# Altium PCB Fly_Buck_Power_Supply_for_Inverter.PcbDoc
Units mm, origin at the board's own origin, x right, y up, seen from the top; angles counter-clockwise.
Board outline 72.81 x 59 mm, 2 copper layers (Top Layer, Bottom Layer), stack 1.24 mm thick; 57 components, 27 nets, 141 pads, 4 vias.
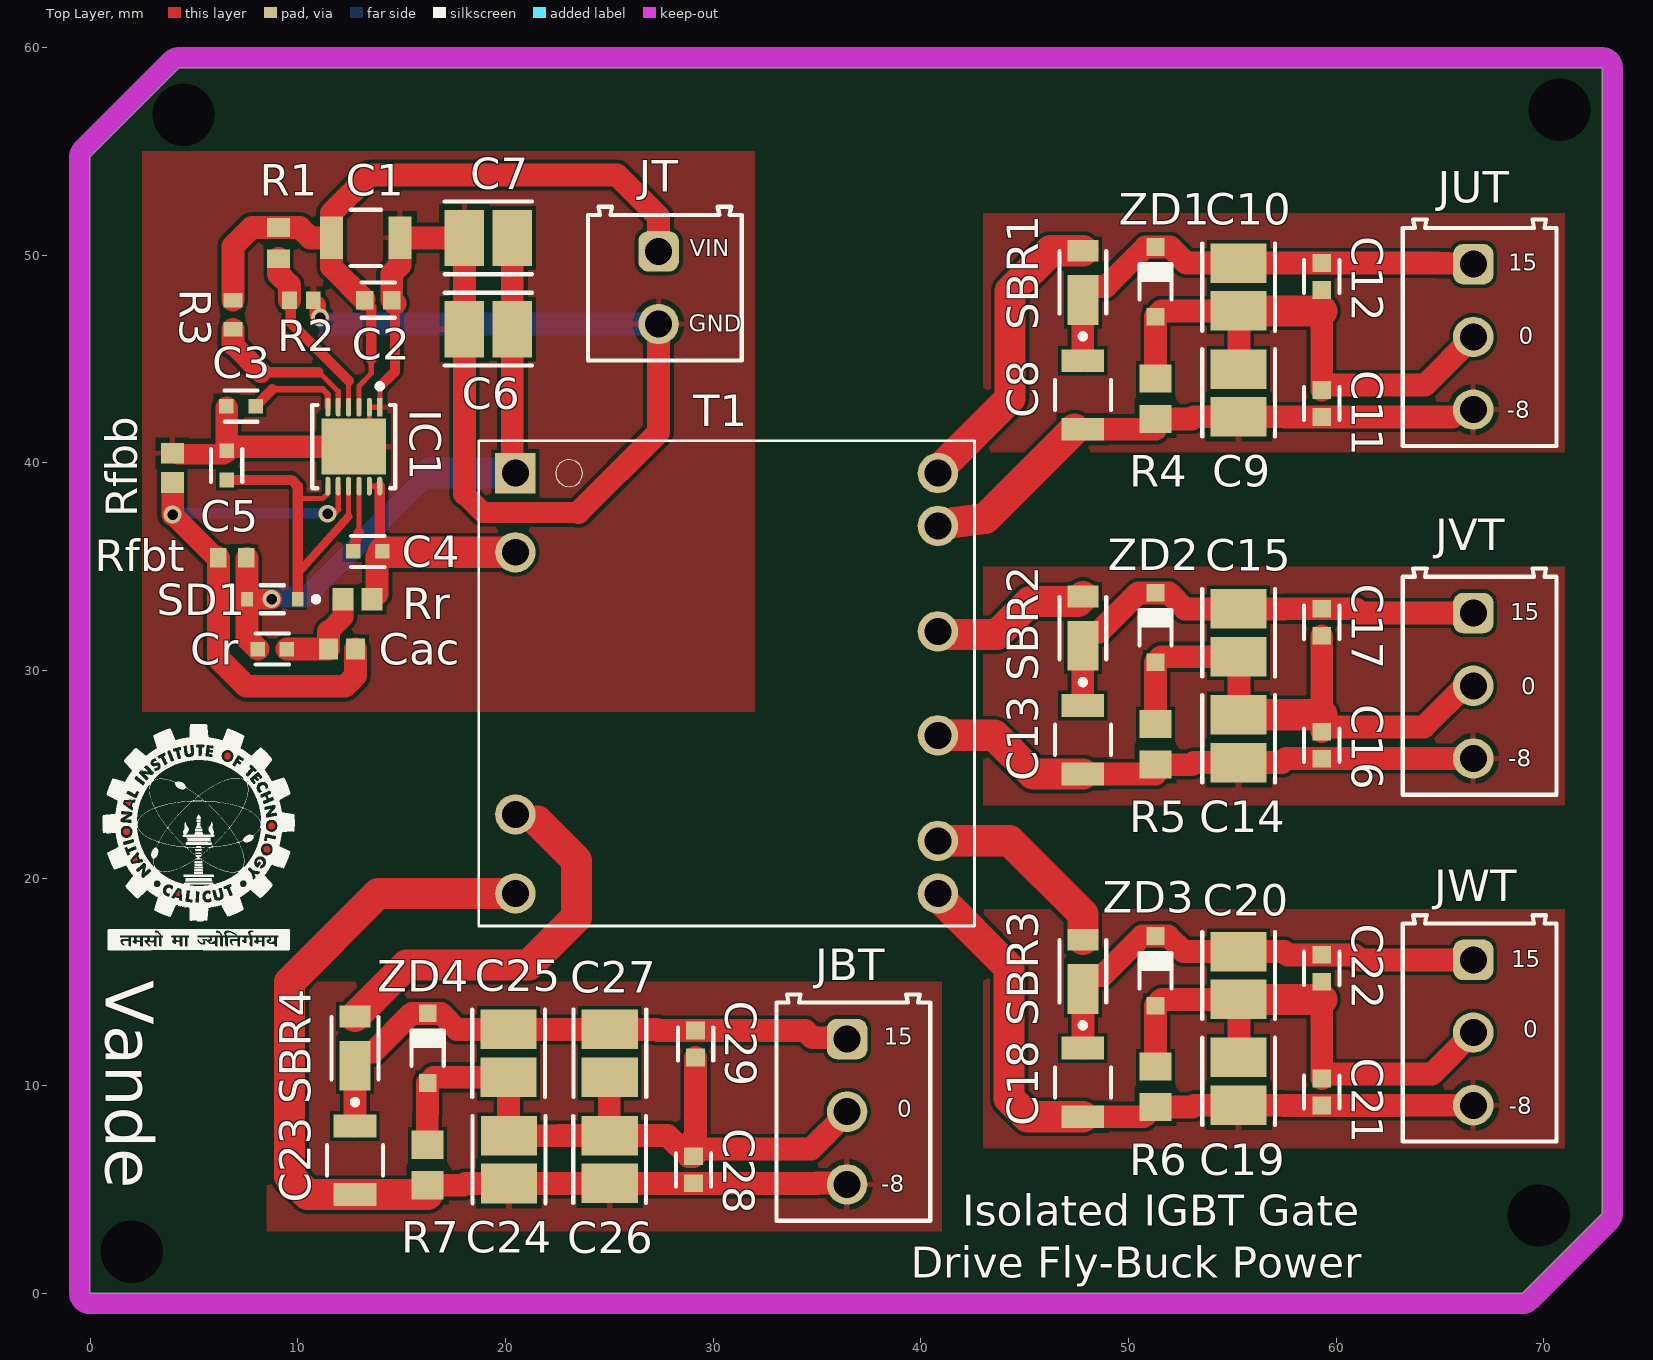
[diagram p0: Top Layer view]
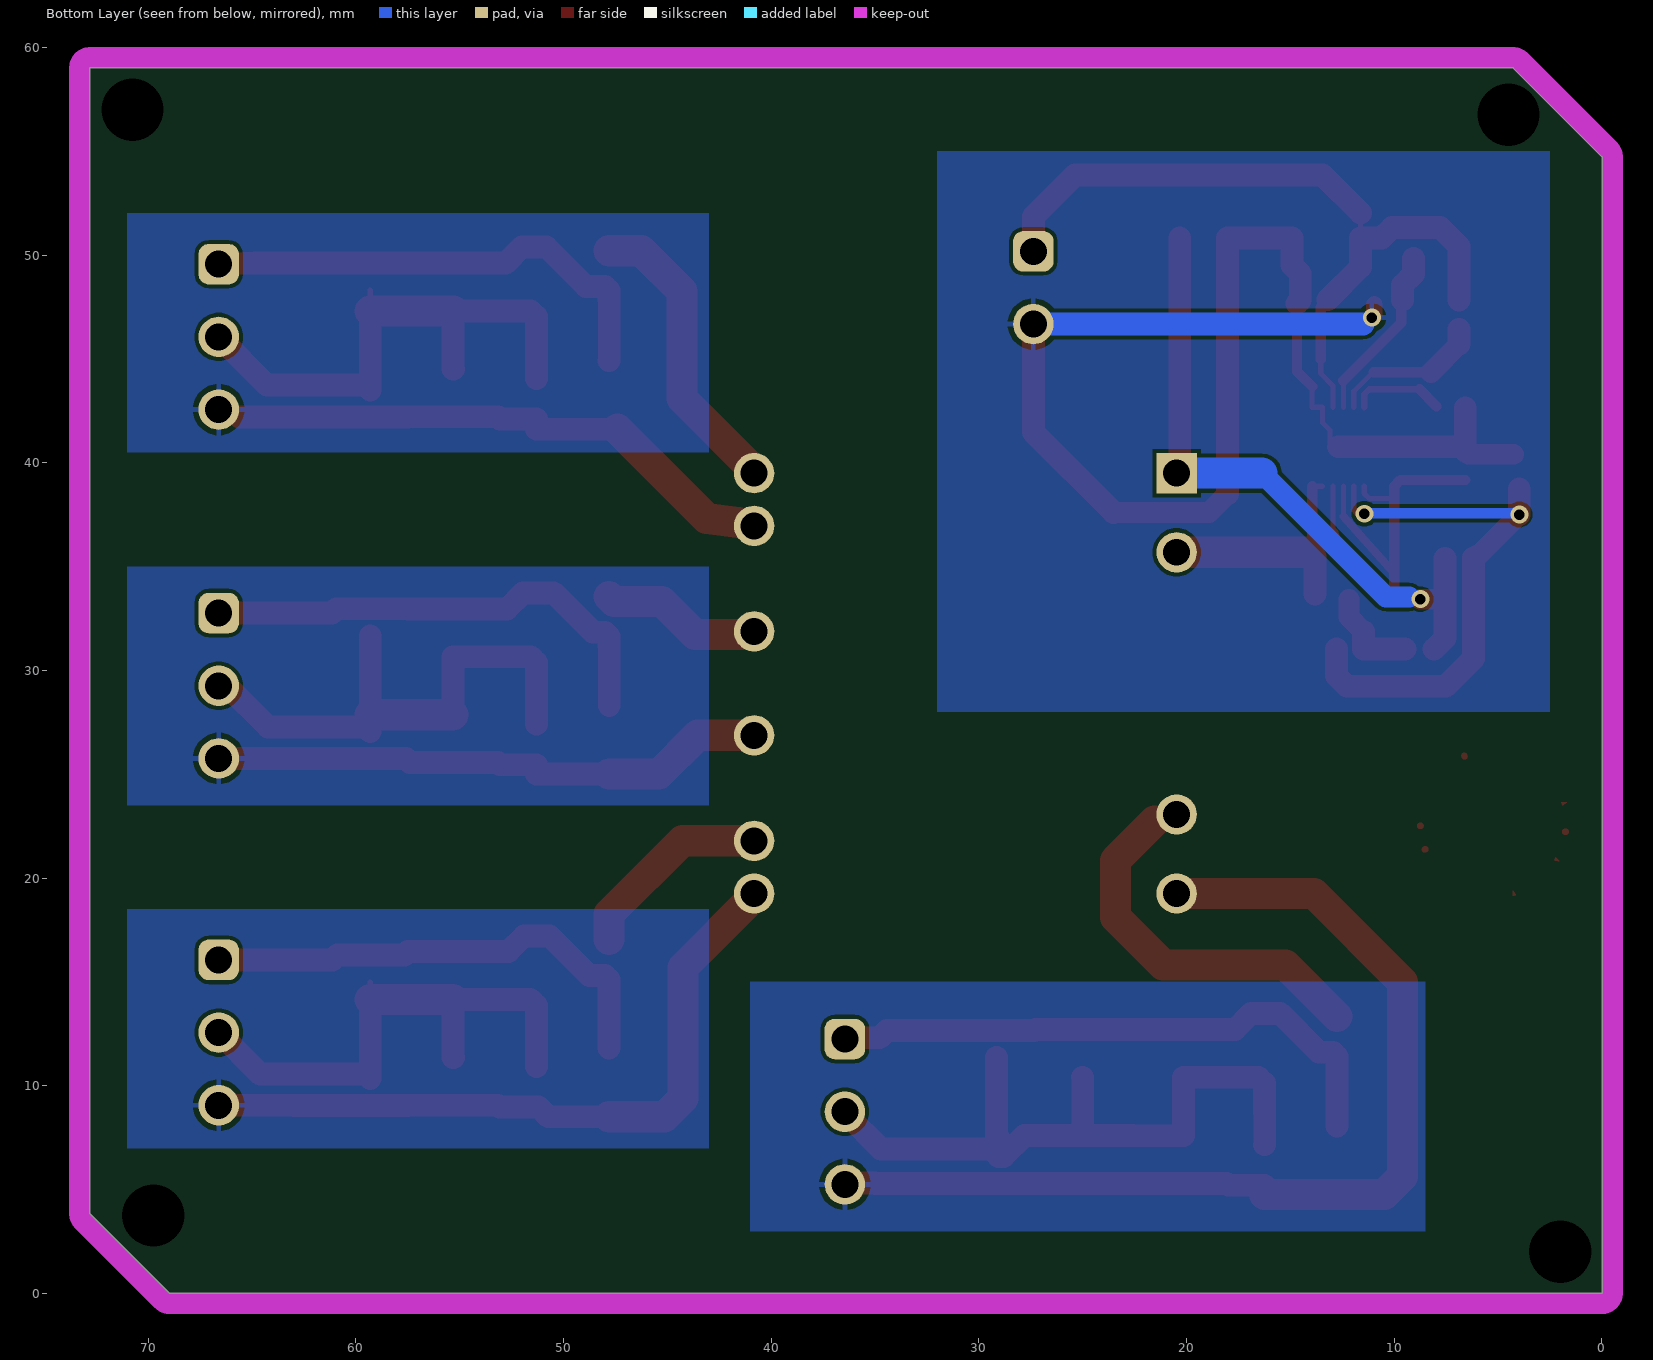
[diagram p1: Bottom Layer view, seen from below]
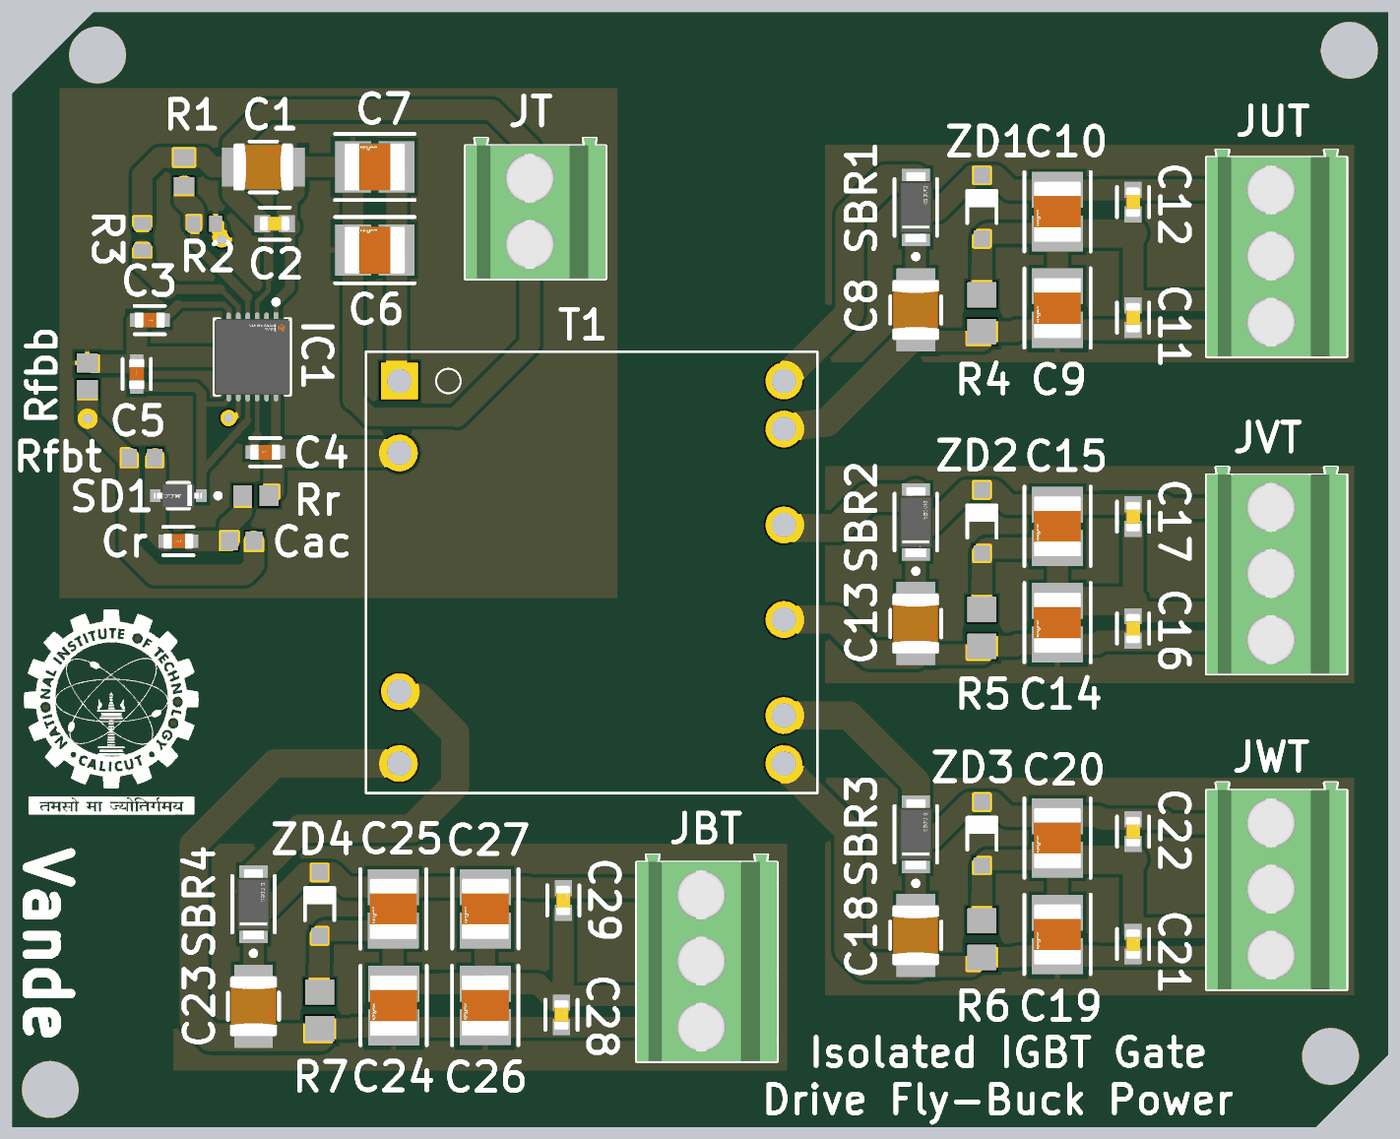
[diagram p2: 3D render of the assembled board from above, using the file's embedded part models]

## Layer stack, top to bottom
Top Solder: solder mask 0.07, SM-001, Dk 4
Top Layer: signal copper 0.12
Dielectric 1: dielectric 1, FR-4, Dk 4.8
Bottom Layer: signal copper 0.12
Bottom Solder: solder mask 0.07, SM-001, Dk 4

## Board outline
-0.01,0.009 68.97,0.009 72.802,3.841 72.802,59.009 4.272,59.009 -0.01,54.727

## Design rules (kind name [scope] priority, off if disabled: settings)
Clearance [All] p1: gap=0.09 ignorepadtopadclearanceinfootprint=FALSE
HoleSize [All] p1: absolutevalues=TRUE maxlimit=3.1 minlimit=0.025 maxpercent=80.000 minpercent=20.000
MinimumSolderMaskSliver [All] p1: minsoldermaskwidth=0.09
PolygonConnect [All] p1: connectstyle=Relief reliefconductorwidth=0.254 reliefentries=4 polygonreliefangle="90 Angle" airgapwidth=0.254
RoutingVias [All] p1: holewidth=0.506 width=0.864 viastyle="Through Hole" minholewidth=0.2 minwidth=0.66 maxholewidth=3.1 maxwidth=2.6
SolderMaskExpansion [All] p1: expansion=0.102 istentingtop=FALSE
UnRoutedNet [All] p1: checkbadconnections=TRUE
Width [All] p1: maxlimit=3 minlimit=0.15 preferedwidth=0.25
27 further rules are at their usual default settings.

## Components (designator, comment, footprint, x,y, rotation, side; value= is the part's Value field where it differs from the comment)
C1 "GRM32ER71H106KA12L" FP-GRM32-MFG 13.275,50.827 r0 top value=10uF
C2 "C0603X104K5RACTU" FP-C0603-CJ-MFG 13.875,47.827 r0 top value=100nF
C3 "C1608X7R1H103K080AA" FP-C1608-080-0_1-MFG 7.264,42.723 r180 top
C4 "C1608X7R1H103K080AA" FP-C1608-080-0_1-MFG 13.375,35.727 r0 top
C5 "C1608X5R1E105K080AC" FP-C1608-080-0_1-MFG 6.575,39.867 r270 top
C6 "GRM32ER71E226KE15L" FP-GRM32E-0_3-0_2-IPC_B 19.175,46.427 r180 top
C7 "GRM32ER71E226KE15L" FP-GRM32E-0_3-0_2-IPC_B 19.175,50.827 r180 top
C8 "GRM32ER71H106KA12L" FP-GRM32-MFG 47.802,43.259 r270 top value=10uF
C9 "GRM32ER71E226KE15L" FP-GRM32E-0_3-0_2-IPC_B 55.302,43.359 r270 top
C10 "GRM32ER71E226KE15L" FP-GRM32E-0_3-0_2-IPC_B 55.302,48.458 r270 top
C11 "C0603X104K5RACTU" FP-C0603-CJ-MFG 59.302,42.849 r270 top value=100nF
C12 "C0603X104K5RACTU" FP-C0603-CJ-MFG 59.302,48.968 r270 top value=100nF
C13 "GRM32ER71H106KA12L" FP-GRM32-MFG 47.802,26.659 r270 top value=10uF
C14 "GRM32ER71E226KE15L" FP-GRM32E-0_3-0_2-IPC_B 55.302,26.709 r270 top
C15 "GRM32ER71E226KE15L" FP-GRM32E-0_3-0_2-IPC_B 55.302,31.808 r270 top
C16 "C0603X104K5RACTU" FP-C0603-CJ-MFG 59.302,26.399 r270 top value=100nF
C17 "C0603X104K5RACTU" FP-C0603-CJ-MFG 59.302,32.318 r270 top value=100nF
C18 "GRM32ER71H106KA12L" FP-GRM32-MFG 47.802,10.159 r270 top value=10uF
C19 "GRM32ER71E226KE15L" FP-GRM32E-0_3-0_2-IPC_B 55.302,10.209 r270 top
C20 "GRM32ER71E226KE15L" FP-GRM32E-0_3-0_2-IPC_B 55.302,15.308 r270 top
C21 "C0603X104K5RACTU" FP-C0603-CJ-MFG 59.302,9.699 r270 top value=100nF
C22 "C0603X104K5RACTU" FP-C0603-CJ-MFG 59.302,15.649 r270 top value=100nF
C23 "GRM32ER71H106KA12L" FP-GRM32-MFG 12.752,6.409 r270 top value=10uF
C24 "GRM32ER71E226KE15L" FP-GRM32E-0_3-0_2-IPC_B 20.167,6.443 r270 top
C25 "GRM32ER71E226KE15L" FP-GRM32E-0_3-0_2-IPC_B 20.152,11.558 r270 top
C26 "GRM32ER71E226KE15L" FP-GRM32E-0_3-0_2-IPC_B 25.015,6.447 r270 top
C27 "GRM32ER71E226KE15L" FP-GRM32E-0_3-0_2-IPC_B 25.024,11.562 r270 top
C28 "C0603X104K5RACTU" FP-C0603-CJ-MFG 29.052,5.949 r270 top value=100nF
C29 "C0603X104K5RACTU" FP-C0603-CJ-MFG 29.152,12.009 r270 top value=100nF
Cac "C0603X102K5RACTU" CAPC1608X87X35NL20T15 12.125,31.027 r0 top
Cr "C1608X7R1H103K080AA" FP-C1608-080-0_1-MFG 8.775,31.027 r180 top
IC1 "LM5160DNTT" FP-DNT0012B-IPC_B 12.695,40.771 r270 top
JBT "691214110003" 691214110003 36.75,8.75 r270 top
JT "691214110002" 691214110002 27.675,48.427 r270 top
JUT "691214110003" 691214110003 66.902,46.059 r270 top
JVT "691214110003" 691214110003 66.902,29.259 r270 top
JWT "691214110003" 691214110003 66.902,12.559 r270 top
R1 "RK73H1JTTD1003F" RESC1608X55X30ML20T10 9.075,50.577 r270 top
R2 "CRCW06038K45FKEA" RESC1609X50X30LL10T20 10.175,47.827 r0 top
R3 "RC0603FR-07453RL" RESC1608X55X25NL10T15 6.875,47.127 r270 top
R4 "ERJ-6ENF5110V" RESC2013X70X40ML20T20 51.302,43.084 r270 top
R5 "ERJ-6ENF5110V" RESC2013X70X40ML20T20 51.302,26.434 r270 top
R6 "ERJ-6ENF5110V" RESC2013X70X40ML20T20 51.302,9.959 r270 top
R7 "ERJ-6ENF5110V" RESC2013X70X40ML20T20 16.252,6.184 r270 top
Rfbb "ERA3AEB2052V" RESC1608X55X30ML20T20 3.962,39.751 r90 top
Rfbt "ERJ-3EKF8662V" RESC1608X55X30NL15T15 6.85,35.427 r180 top
Rr "ERA3AEB2052V" RESC1608X55X30ML20T20 12.875,33.427 r180 top
SBR1 "DFLS1200-7" FP-PowerDI123-MFG 47.802,48.684 r270 top value=23pF
SBR2 "DFLS1200-7" FP-PowerDI123-MFG 47.802,32.034 r270 top value=23pF
SBR3 "DFLS1200-7" FP-PowerDI123-MFG 47.802,15.509 r270 top value=23pF
SBR4 "DFLS1200-7" FP-PowerDI123-MFG 12.752,11.809 r270 top value=23pF
SD1 "RB500V-40-TP" FP-SOD-323-MFG 8.775,33.427 r180 top
T1 "750315038" PCBComponent_1 30.775,29.629 r0 top
ZD1 "MMSZ5245B-E3-08" VISH-SOD-123-2_V 51.302,48.709 r90 top
ZD2 "MMSZ5245B-E3-08" VISH-SOD-123-2_V 51.302,32.059 r90 top
ZD3 "MMSZ5245B-E3-08" VISH-SOD-123-2_V 51.302,15.534 r90 top
ZD4 "MMSZ5245B-E3-08" VISH-SOD-123-2_V 16.252,11.809 r90 top

## Footprints (in the part's own frame and the unit in brackets; to place one, negate y for a bottom-side part, rotate by r counter-clockwise, add the part's x,y. Pads: shape width x height; smd on the part's side, far side on the other; paste and mask are expansions set on the pad)
691214110002 [mm] "3.50 mm Horizontal Entry Modular, 2p"
  rrect50% 1.95x1.95 hole 1.3: 1(-1.75,-0.3)
  round 1.95 hole 1.3: 2(1.75,-0.3)
  silkscreen extent -3.9,-3.7 3.5,3.7, body extent -3.95,-3.7 3.5,3.7, height 8.55
691214110003 [mm] "3.50 mm Horizontal Entry Modular, 3p"
  rrect50% 1.95x1.95 hole 1.3: 1(-3.5,-0.3)
  round 1.95 hole 1.3: 2(0,-0.3) 3(3.5,-0.3)
  silkscreen extent -5.65,-3.7 5.25,3.7, body extent -5.7,-3.7 5.25,3.7, height 8.55
CAPC1608X87X35NL20T15 [mm] "Chip Capacitor, 2-Leads, Body 1.60x0.80mm, IPC Medium Density"
  rect 0.9x1 smd: 1(-0.65,0) 2(0.65,0)
  body extent -0.9,-0.5 0.9,0.5, height 0.87
FP-C0603-CJ-MFG [mm]
  rect 0.85x0.9 smd paste+0 mask+0: 1(-0.65,0) 2(0.65,0)
  silkscreen extent -0.8,-0.85 0.8,0.85, body extent -1.2,-0.6 1.2,0.6, height 0.25
FP-C1608-080-0_1-MFG [mm]
  rect 0.7x0.7 smd paste+0 mask+0: 1(-0.7,0) 2(0.7,0)
  silkscreen extent -0.8,-0.75 0.8,0.75, body extent -1.15,-0.55 1.15,0.55, height 0.25
FP-DNT0012B-IPC_B [mm]
  rect 0.91x0.242 smd paste+0 mask+0: 1(-1.901,1.25)
  rrect100% 0.91x0.242 smd paste+0 mask+0: 2(-1.901,0.75) 3(-1.901,0.25) 4(-1.901,-0.25) 5(-1.901,-0.75) 6(-1.901,-1.25) 7(1.901,-1.25) 8(1.901,-0.75) 9(1.901,-0.25) 10(1.901,0.25) 11(1.901,0.75) 12(1.901,1.25)
  rect 2.7x3.1 smd paste-1000 mask+0: 13(0,0)
  silkscreen extent -3.03,-2 2,2, body extent -2.61,-2.25 2.61,2.25, height 0.25
FP-GRM32-MFG [mm]
  rect 1.1x2.05 smd paste+0 mask+0: 1(-1.65,0) 2(1.65,0)
  silkscreen extent -0.73,-1.35 0.73,1.35, body extent -2.3,-1.45 2.3,1.45, height 0.25
FP-GRM32E-0_3-0_2-IPC_B [mm]
  rect 1.903x2.706 smd paste+0 mask+0: 1(-1.151,0) 2(1.151,0)
  silkscreen extent -2.1,-1.75 2.1,1.75, body extent -2.35,-1.6 2.35,1.6, height 0.25
FP-PowerDI123-MFG [mm]
  rect 2.4x1.5 smd paste+0 mask+0: 1(0.85,0)
  rect 1.05x1.5 smd paste+0 mask+0: 2(-1.525,0)
  silkscreen extent -1.5,-1.13 2.72,1.13, body extent -2.15,-1.06 2.15,1.06, height 0.25
FP-SOD-323-MFG [mm]
  rect 0.56x0.69 smd paste+0 mask+0: 1(-1.22,0) 2(1.22,0)
  silkscreen extent -2.23,-0.67 0.56,0.67, body extent -1.6,-0.77 1.6,0.77, height 0.25
PCBComponent_1 [mil]
  rect 76.5x76.5 hole 51: 1(-405.5,388.5)
  round 76.5 hole 51: 2(-405.5,238.5) 5(-405.5,-258.5) 6(-405.5,-408.5) 7(395.5,-408.5) 8(395.5,-308.5) 10(395.5,-108.5) 11(395.5,88.5) 13(395.5,288.5) 14(395.5,388.5)
  silkscreen extent -475,-470 465,450
RESC1608X55X25NL10T15 [mm] "Chip Resistor, 2-Leads, Body 1.60x0.80mm, IPC Medium Density"
  rect 0.7x0.9 smd: 1(-0.7,0) 2(0.7,0)
  body extent -0.85,-0.45 0.85,0.45, height 0.55
RESC1608X55X30ML20T10 [mm] "Chip Resistor, 2-Leads, Body 1.60x0.80mm, IPC Low Density"
  rect 0.9x1.1 smd: 1(-0.75,0) 2(0.75,0)
  body extent -0.9,-0.5 0.9,0.5, height 0.55
RESC1608X55X30ML20T20 [mm] "Chip Resistor, 2-Leads, Body 1.60x0.80mm, IPC Low Density"
  rect 1x1.1 smd: 1(-0.7,0) 2(0.7,0)
  body extent -0.9,-0.5 0.9,0.5, height 0.55
RESC1608X55X30NL15T15 [mm] "Chip Resistor, 2-Leads, Body 1.60x0.80mm, IPC Medium Density"
  rect 0.8x0.95 smd: 1(-0.675,0) 2(0.675,0)
  body extent -0.87,-0.48 0.87,0.48, height 0.55
RESC1609X50X30LL10T20 [mm] "Chip Resistor, 2-Leads, Body 1.55x0.85mm, IPC High Density"
  rect 0.7x0.85 smd: 1(-0.575,0) 2(0.575,0)
  body extent -0.82,-0.48 0.82,0.48, height 0.5
RESC2013X70X40ML20T20 [mm] "Chip Resistor, 2-Leads, Body 2.00x1.25mm, IPC Low Density"
  rect 1.35x1.55 smd: 1(-0.975,0) 2(0.975,0)
  body extent -1.1,-0.72 1.1,0.72, height 0.7
VISH-SOD-123-2_V [mm] "SMD, 2-Leads, Body 2.7x1.55mm, Height 1.35mm"
  rect 0.85x0.85 smd: 1(-1.675,0) 2(1.675,0)
  silkscreen extent -0.85,-0.78 0.85,0.78, body extent -1.35,-0.77 1.35,0.77, height 1.35

## Part data
C1 C8 C13 C18 C23: library part CMP-2000-05261-2, "CAP CER 10µF 50V X7R 1210", Capacitance=10uF, Manufacturer=Murata, Package=GRM32, Temperature="-55°C to +125°C", Temperature Characteristic=X7R, Temperature Coefficient=15%, Temperature Range High=+125°C, Temperature Range Low=-55°C, Tolerance=10%, Voltage Rating=50V, Automotive=No, Category=Cap, ComponentLink2Description=Datasheet, ComponentLink2URL=https://search.murata.co.jp/Ceramy/image/img/A01X/G101/ENG/GRM32ER71H106KA12-01.pdf, Device Class L1="Passive Components", Device Class L2=Capacitors, Device Class L3="Ceramic Capacitors", Digikey Description="CAP CER 10UF 50V X7R 1210", Height=2.7mm, Lead Free=Yes, Manufacturer Part Number=GRM32ER71H106KA12L, Material=Ceramic, Mouser Description="1210 10 uF 50 V ±10% Tolerance X7R SMT Multilayer Ceramic Capacitor", Octopart=https://octopart.com/grm32er71h106ka12l-murata-10470987, RoHS=TRUE
C2 C11 C12 C16 C17 C21 C22 C28 C29: library part CMP-2006-03300-2, "CAP CER 0.1µF 50V X7R 0603", Capacitance=100nF, Manufacturer=Kemet, Package=C0603-CJ, Temperature="-55°C to +125°C", Temperature Characteristic=X7R, Temperature Coefficient=15%, Temperature Range High=+125°C, Temperature Range Low=-55°C, Tolerance=10%, Voltage=50V, Automotive=No, Category=Cap, ComponentLink2Description=Datasheet, ComponentLink2URL=https://content.kemet.com/datasheets/KEM_C1013_X7R_FT-CAP_SMD.pdf, Device Class L1="Passive Components", Device Class L2=Capacitors, Device Class L3="Ceramic Capacitors", Digikey Description="CAP CER 0.1UF 50V X7R 0603", Height=0.95mm, Ipc Land Pattern Name=CAPC16080X80, Lead Free=Yes, Manufacturer Part Number=C0603X104K5RACTU, Material=Ceramic, Mouser Description="Capacitor; Ceramic; Cap 0.1uF; Tol+10%; SMT; Flexible Termination; Vol-Rtg 50V; TR", Octopart=https://octopart.com/c0603x104k5ractu-kemet-9145062, RoHS=TRUE, Voltage Rating=50V
C3 C4 Cr: library part CMP-2000-06026-2, "Multilayer Ceramic Capacitors 0.01µF ±10% 50V X7R SMD 0603", Capacitance=10nF, Case Code (Imperial)=0603, Case Code (Metric)=1608, Dielectric=X7R, Dielectric Material=Ceramic, Max Operating Temperature=125°C, Min Operating Temperature=-55°C, Package Quantity=1, Tolerance=10%, Voltage=50V, Case/Package=0603, Construction=Flat, Depth=0.8mm, Height=0.8mm, Lead Free="Lead Free", Length=1.6mm, Mount="Surface Mount", Packaging="Tape and Reel", Radiation Hardening=No, REACH SVHC="No SVHC", Resistor Type=Ceramic, RoHS Compliant=Yes, Series=C, Termination=SMD/SMT, Thickness=0.037inch, Voltage Rating=50V, Voltage Rating (DC)=50V, Weight=7.1E-05oz, Width=0.031inch
C5: library part CMP-08246-002647-1, "Multilayer Ceramic Capacitors 1μF ±10% 25V X5R SMD 0603", Capacitance=1uF, Case Code (Imperial)=0603, Case Code (Metric)=1608, Dielectric=X5R, Dielectric Material=Ceramic, Max Operating Temperature=85°C, Min Operating Temperature=-55°C, Package Quantity=1, Tolerance=10%, Voltage Rating=25V, Case/Package=0603, Depth=0.8mm, Lead Free="Lead Free", Length=0.063inch, Mount="Surface Mount", Number of Pins=2, Packaging="Tape and Reel", REACH SVHC="No SVHC", Resistor Type=Ceramic, RoHS Compliant=Yes, Series=C, Termination=SMD/SMT, Thickness=0.037inch, Voltage Rating (DC)=25V, Weight=7.1E-05oz, Width=0.031inch
C6 C7 C9 C10 C14 C15 C19 C20 C24 C25 C26 C27: library part CMP-1662-00021-2, "Chip Multilayer Ceramic Capacitors for General Purpose, 1210, 22µF, X7R, 15%, 10%, 25V", Capacitance=22uF, Case Code (Imperial)=1210, Case Code (Metric)=3225, Dielectric=X7R, Max Operating Temperature=125°C, Min Operating Temperature=-55°C, Package Quantity=1, Tolerance=10%, Voltage=25V, Case/Package=1210, Depth=2.5mm, Height=2.5mm, Lead Free="Lead Free", Length=3.2mm, Material=Ceramic, Mount="Surface Mount", Number of Pins=2, Packaging="Tape and Reel", Radiation Hardening=No, REACH SVHC="No SVHC", Termination=SMD/SMT, Thickness=0.106inch, Voltage Rating=25V, Voltage Rating (DC)=25V, Width=0.098inch
Cac: library part CMP-2006-02994-1, "Multilayer Ceramic Capacitor, 1000 pF, 50 V, ± 10%, X7R, 0603 [1608 Metric]", Manufacturer=Kemet, Part Number=C0603X102K5RACTU
IC1: "LM5160 wide input 65V, 2A synchronous buck/Fly-Buck converter 12-WSON -40 to 125"
JBT JUT JVT JWT: library part CMP-1502-02466-2, "Conn Terminal Block 3 POS 3.5mm Solder ST Thru-Hole 10A Box", Color="Blue, Green", Current=10A, Max Operating Temperature=105°C, Min Operating Temperature=-40°C, Voltage=300V, Contact Material=Brass, Contact Plating="Brass, Tin", Current Rating=10A, Height=12.2mm, Housing Material=Nylon, Lead Pitch=3.5mm, Length=7.4mm, Mount="Through Hole", NexarPartId=18818289, Number of Contacts=3, Number of Levels=1, Number of Pins=3, Number of Positions Per Level=3, Packaging=Box, Pitch=3.5052mm, Plating="Brass, Steel", REACH SVHC=Unknown, RoHS=Compliant, Stripping Length=-6mm, Termination=Screw, Voltage Rating=300V, Width=10.9mm, Wire Gauge (Max)=24AWG, Wire Gauge (Min)=16AWG, Wire/Cable Gauge=24AWG
JT: library part CMP-1502-02464-2, "Conn Terminal Block 2 POS 3.5mm Solder ST Thru-Hole 10A Box", Color="Blue, Green", Current=10A, Max Operating Temperature=105°C, Min Operating Temperature=-40°C, Voltage=300V, Contact Material=Brass, Contact Plating="Brass, Tin", Current Rating=10A, Height=8.7mm, Housing Material=Nylon, Lead Pitch=3.5mm, Length=7.4mm, Mount="Through Hole", NexarPartId=18818288, Number of Contacts=2, Number of Levels=1, Number of Pins=2, Number of Positions Per Level=2, Number of Rows=1, Packaging=Box, Pitch=3.5052mm, Plating="Brass, Steel", REACH SVHC=Unknown, RoHS=Compliant, Stripping Length=-6mm, Termination=Screw, Voltage Rating=300V, Width=7.9mm, Wire Gauge (Max)=24AWG, Wire Gauge (Min)=16AWG, Wire/Cable Gauge=24AWG
R1: library part CMP-2000-01100-1, "Res Thick Film 0603 100K Ohm 1% 0.1W(1/10W) ±100ppm/C Pad SMD Automotive T/R", Manufacturer="KOA Speer", Part Number=RK73H1JTTD1003F
R2: library part CMP-2000-03623-1, "SMD Chip Resistor, 8.45K Ohm, ± 1%, 100 mW, 0603 [1608 Metric], Thick Film, General Purpose", Manufacturer="Vishay Dale", Part Number=CRCW06038K45FKEA
R3: library part CMP-2000-04056-1, "SMD Chip Resistor, 453 Ohm, ± 1%, 100 mW, 0603 [1608 Metric], Thick Film, General Purpos", Manufacturer=Yageo, Part Number=RC0603FR-07453RL
R4 R5 R6 R7: library part CMP-2001-00217-1, "SMD Chip Resistor, 511 Ohm, ± 1%, 125 mW, 0805 [2012 Metric], Thick Film, Precision", Manufacturer=Panasonic, Part Number=ERJ-6ENF5110V
Rfbb Rr: library part CMP-2000-00949-1, "Res Thin Film 0603 20.5K Ohm 0.1% 0.1W(1/10W) ±25ppm/C Pad SMD Automotive T/R", Manufacturer=Panasonic, Part Number=ERA3AEB2052V
Rfbt: library part CMP-2000-00671-1, Manufacturer=Panasonic, Part Number=ERJ-3EKF8662V
SBR1 SBR2 SBR3 SBR4: library part CMP-2000-07540-2, "Rectifier Diode, Schottky, 200V, 1A", Capacitance=23pF, Forward Current=1A, Manufacturer="Diodes Inc.", Max Junction Temp=+175°C, Max Repetitive Reverse Voltage=200V, Max Surge Forward Current=40A, Package=PowerDI123, Peak Reverse Current=2uA, Temperature="-65°C to +175°C", Temperature Range Low=-65°C, Automotive=Yes, Automotive Grade="Grade 0", Category=Diode, ComponentLink2Description=Datasheet, ComponentLink2URL=https://www.diodes.com/assets/Datasheets/ds30628.pdf, Device Class L1="Discrete Semiconductors", Device Class L2=Diodes, Device Class L3="Schottky Diodes", Digikey Description="DIODE SCHOTTKY 200V POWERDI123", Footprint Url=https://www.diodes.com/assets/Package-Files/PowerDI123.pdf, Height=1mm, Lead Free=Yes, Manufacturer Part Number=DFLS1200-7, Mouser Description="Schottky Diodes & Rectifiers SCHOTTKY RECTIFIER", Octopart=https://octopart.com/dfls1200-7-diodes+inc.-13134059, Reverse Voltage=200V, RoHS=TRUE, Temperature Range High=+175°C
SD1: library part CMP-56206-000003-1, "Rectifier Diode Schottky 45V 0.1A", Average Rectified Current=100mA, Max Reverse Voltage (DC)=40V, Max Surge Current=1A, Package Quantity=1, Lead Free="Lead Free", Mount="Surface Mount", Packaging="Tape and Reel"
ZD1 ZD2 ZD3 ZD4: library part CMP-0931-00033-1, "MMSZ5245 Series 15V ±5% 500 mW SMT Small Signal Zener Diode - SOD-123", Manufacturer="Vishay Semiconductor", Operating Temperature="-55 to 150 degC", Power Dissipation (mW)=500, Test Current (IZT1) (mA)=8.5, Tolerance="+/- 5%", Zener Voltage (NOM.) (V)=15, ComponentLink1Description="Manufacturer URL", ComponentLink1URL=http://www.vishay.com/, ComponentLink2Description=Datasheet, ComponentLink2URL=http://www.vishay.com/docs/85774/mmsz5225.pdf, ComponentLink3Description="Package Specification", ComponentLink3URL=http://www.vishay.com/docs/85774/mmsz5225.pdf, DatasheetVersion="Rev. 1.9", Int. Construction=Single, Mounting Technology="Surface Mount", PackageDescription="2-Pin SMD, Body 2.7 x 1.55 mm, Height 1.35 mm", PackageReference=SOD-123-2, PackageVersion="Rev. 1.9", Packing="Tape and Reel", PartNumber=MMSZ5245B-E3-08, RoHS=TRUE, Zener Impedance (IZT1) (Max.) (Ohm)=16

## Free pads (board coordinates)
  round 1.524 hole 3: 2(70.75,57) 3(69.75,3.75) 4(4.5,56.75) 7(2,2)

## Via types
v1: diameter 0.864, hole 0.506, Top Layer to Bottom Layer, 4 vias

## Nets (pads, with @x,y where several pads share a name; then routed paths per layer and width w, separated by ;. In a path a pad name is that pad's centre, name@x,y a point inside that pad or via, vN(x,y) a via of type N, cw(c..) or ccw(c..) an arc to the next point about the centre after c; other vN are vias at no path point)
BST: C4.1 IC1.10 | length 3.2
  Top Layer w0.25: C4.1 12.709,35.952 C4.1@12.709,35.986 ; 12.931,36.621 12.945,36.703 IC1.10
  Top Layer w0.5: C4.1@12.709,35.986 12.931,36.621
FB: Cac.2 IC1.8 Rfbb.1 Rfbt.2 | length 27.6
  Top Layer w0.25: 5.629,35.427 Rfbt.2 ; v1(11.439,37.541) 11.53,37.541 11.591,37.602 v1@11.798,37.602 ; 11.945,37.748 IC1.8
  Top Layer w0.3: v1@11.798,37.602 11.945,37.748
  Top Layer w1: v1(3.975,37.503) 5.976,35.502 6.1,35.502 Rfbt.2
  Top Layer w1.1: v1(3.975,37.503) Rfbb.1@3.975,38.727 ; Rfbt.2 6.175,30.579 7.518,29.235 12.268,29.235 12.775,29.742 Cac.2
  Bottom Layer w0.5: v1(3.975,37.503) 4.042,37.57 11.481,37.57 11.452,37.541 v1(11.439,37.541)
GND: C1.2 C2.2 C3.2 C5.1 C6.2 C7.2 IC1.1 IC1.2 IC1.13 JT.2 R2.2 Rfbb.2 | length 72
  Top Layer w0.25: Rfbb.2@3.975,40.127 Rfbb.2@4.259,40.411 ; C5.1@6.419,40.411 C5.1 C5.1@6.778,40.771 ; R2.2 R2.2@10.958,47.618 ; v1@10.958,47.106 v1(11.076,46.989) ; IC1.13 13.089,40.771 13.089,41.567 13.445,41.922 IC1.2 IC1.1 ; IC1.1@13.951,42.666 13.951,43.669
  Top Layer w0.5: 13.951,43.669 14.525,44.243 14.681,44.399 C2.2@14.681,47.67
  Top Layer w0.8: v1@10.958,47.106 R2.2@10.958,47.618
  Top Layer w1: Rfbb.2@4.259,40.411 C5.1@6.419,40.411 ; 18.024,38.491 18.911,37.604 23.51,37.604
  Top Layer w1.1: C5.1 6.575,41.592 C3.2@6.575,42.627 ; C5.1@6.778,40.771 IC1.13 ; C2.2@14.681,47.67 C2.2 14.525,49.111 14.925,49.511 C1.2 C7.2 C6.2 18.024,38.491 ; 23.51,37.604 27.375,41.469 JT.2
  Bottom Layer w0.25: v1(11.076,46.989) 11.192,46.989 11.504,46.677
  Bottom Layer w1.1: 11.504,46.677 JT.2
NetC6_1: C6.1 C7.1 Cr.2 Rfbt.1 SD1.2 T1.1 | length 31.5
  Top Layer w0.25: Rfbt.1 Rfbt.1@7.555,35.397 ; T1.1@20.325,39.646 T1.1
  Top Layer w1: SD1.2 v1(8.741,33.427)
  Top Layer w1.1: Rfbt.1@7.555,35.397 SD1.2 7.555,31.547 Cr.2 ; T1.1@20.325,39.646 C6.1 C7.1
  Bottom Layer w0.25: v1(8.741,33.427) 8.847,33.533 9.276,33.533
  Bottom Layer w1: 9.276,33.533 10.394,33.533 16.357,39.497
  Bottom Layer w1.5: 16.357,39.497 T1.1
NetCac_1: Cac.1 Cr.1 Rr.2 | length 4.7
  Top Layer w1: 11.475,31.864 12.175,32.564 Rr.2
  Top Layer w1.1: Cr.1 Cac.1 11.475,31.864
NetSBR1_2: SBR1.2 T1.14 | length 14.5
  Top Layer w1.5: T1.14 40.82,39.617 44.298,43.094 44.298,48.255 46.252,50.209 SBR1.2
NetSBR2_2: SBR2.2 T1.11 | length 7.8
  Top Layer w1.5: T1.11 40.905,31.792 41.218,31.792 41.286,31.725 43.663,31.725 45.252,33.314 47.557,33.314 SBR2.2
NetSBR3_2: SBR3.2 T1.8 | length 9.7
  Top Layer w1.5: T1.8 44.272,21.793 47.802,18.264 SBR3.2
NetSBR4_2: SBR4.2 T1.5 | length 19.2
  Top Layer w0.25: T1.5 20.799,22.739 21.533,22.739
  Top Layer w1.5: SBR4.2 15.227,15.809 21.117,15.809 23.419,18.11 23.419,20.853 21.533,22.739
REF_B: C24.1 C25.2 C26.1 C27.2 C28.1 C29.2 JBT.2 R7.1 ZD4.1 | length 35.1
  Top Layer w0.25: ZD4.1 ZD4.1@16.525,10.408 ; C25.2@20.142,10.408 C25.2
  Top Layer w1.1: R7.1 16.23,7.159 16.23,8.652 16.252,8.674 ZD4.1 ; ZD4.1@16.525,10.408 20.142,10.408 20.142,7.594 C24.1 22.576,7.594 22.58,7.598 C26.1@24.993,7.598 ; C27.2 24.993,10.412 C26.1@24.993,7.598 ; C29.2 29.152,7.586 29.052,7.486 29.052,7.036 C28.1 ; JBT.2@36.352,8.809 36.352,8.589 34.722,6.96 29.412,6.96 C28.1 ; C26.1@24.993,7.598 C26.1 27.812,7.598 28.811,6.599 C28.1
REF_U_T: C9.1 C10.2 C11.1 C12.2 JUT.2 R4.1 ZD1.1 | length 27.1
  Top Layer w0.25: C10.2 C10.2@55.311,47.308 ; 59.302,47.308 C12.2
  Top Layer w1.1: R4.1 51.298,44.059 51.298,45.538 51.302,45.542 ZD1.1 51.575,47.308 C10.2 ; C9.1 55.311,44.51 C10.2@55.311,47.308 ; 59.302,47.308 C11.1 59.541,43.739 64.282,43.739 JUT.2
  Top Layer w1.5: C10.2 59.302,47.308
REF_V_T: C14.1 C15.2 C16.1 C17.2 JVT.2 R5.1 ZD2.1 | length 26.7
  Top Layer w0.25: C14.1 C14.1@55.311,27.86 ; C16.1 59.302,27.86 ; JVT.2@66.209,29.259 JVT.2
  Top Layer w1.1: R5.1 51.298,27.409 51.298,28.892 51.302,28.896 ZD2.1 51.575,30.658 55.311,30.658 C14.1@55.311,27.86 ; C16.1 59.532,27.28 64.23,27.28 JVT.2@66.209,29.259 ; 59.302,27.86 C17.2
  Top Layer w1.5: C14.1@55.311,27.86 59.302,27.86
REF_W_T: C19.1 C20.2 C21.1 C22.2 JWT.2 R6.1 ZD3.1 | length 26.7
  Top Layer w0.25: C20.2 C20.2@55.311,14.158 ; C21.1 C21.1@59.511,10.559 ; 59.302,14.158 C22.2
  Top Layer w1.1: R6.1 51.298,10.934 51.298,12.402 51.302,12.406 ZD3.1 51.6,14.158 C20.2 ; C19.1 55.311,11.36 C20.2@55.311,14.158 ; C21.1 59.302,14.158 ; C21.1@59.511,10.559 64.602,10.559 JWT.2
  Top Layer w1.5: C20.2@55.311,14.158 59.302,14.158
RON: IC1.5 R3.2 | length 7.5
  Top Layer w0.25: 10.998,44.348 11.032,44.348 11.945,43.436 IC1.5
  Top Layer w0.5: 8.23,44.348 10.998,44.348
  Top Layer w1: 6.875,45.703 8.23,44.348
  Top Layer w1.1: 6.875,45.703 R3.2
SS: C3.1 IC1.6 | length 4.5
  Top Layer w0.3: 8.777,43.536 11.201,43.536 11.445,43.292 IC1.6
  Top Layer w0.5: C3.1 8.777,43.536
SW: C4.2 IC1.11 IC1.12 Rr.1 T1.2 | length 12.6
  Top Layer w0.25: IC1.11 IC1.12 ; Rr.1 Rr.1@13.818,33.67 ; C4.2@13.818,35.47 C4.2 ; C4.2@13.945,35.857 C4.2 ; C4.2@14.115,35.687 C4.2
  Top Layer w0.5: C4.2@13.945,35.857 IC1.12
  Top Layer w1.1: Rr.1@13.818,33.67 C4.2@13.818,35.47
  Top Layer w1.5: C4.2@14.115,35.687 T1.2
UVLO: IC1.4 R1.2 R2.1 | length 8.6
  Top Layer w0.25: IC1.4 12.445,43.943
  Top Layer w0.5: R2.1 9.651,47.776 9.651,46.737 12.445,43.943
  Top Layer w1.1: R1.2 9.075,49.077 9.6,48.552 R2.1
VCC: C5.2 IC1.7 IC1.9 SD1.1 | length 16
  Top Layer w0.25: 9.995,38.278 11.147,38.278 11.194,38.278 11.365,38.437 ccw(c11.195,38.62) 11.377,38.449 11.445,38.521 IC1.7 ; 12.437,37.413 IC1.9
  Top Layer w0.4: 9.995,34.68 12.437,37.413
  Top Layer w0.5: C5.2 9.697,39.167 9.995,38.869 9.995,38.278 9.995,34.68 SD1.1
VCC_B: C23.1 C25.1 C27.1 C29.1 JBT.1 SBR4.1 ZD4.2 | length 28.3
  Top Layer w1.1: C23.1 C23.1 12.75,10.505 12.752,10.507 12.752,11.409 12.952,11.609 13.615,11.609 15.49,13.484 16.895,13.484 17.67,12.709 22.576,12.709 22.58,12.713 C27.1 27.279,12.713 27.333,12.659 C29.1 34.428,12.659 34.778,12.309 JBT.1@36.352,12.309
VCC_U_T: C8.1 C10.1 C12.1 JUT.1 SBR1.1 ZD1.2 | length 23.4
  Top Layer w1.1: C8.1 47.793,44.909 47.793,47.815 SBR1.1 ; SBR1.1@47.802,47.824 47.802,48.284 48.002,48.484 48.916,48.484 50.816,50.384 52.004,50.384 52.779,49.609 57.495,49.609 57.505,49.618 C12.1 64.858,49.618 JUT.1
VCC_V_T: C13.1 C15.1 C17.1 JVT.1 SBR2.1 ZD2.2 | length 23.4
  Top Layer w0.25: C13.1@47.793,28.309 C13.1 ; SBR2.1@47.793,31.175 SBR2.1
  Top Layer w1.1: C13.1@47.793,28.309 SBR2.1@47.793,31.175 ; SBR2.1 47.802,31.634 48.002,31.834 48.572,31.834 50.472,33.734 51.94,33.734 52.715,32.959 57.495,32.959 57.505,32.968 C17.1 60.938,32.968 61.147,32.759 JVT.1
VCC_W_T: C18.1 C20.1 C22.1 JWT.1 SBR3.1 ZD3.2 | length 23.4
  Top Layer w1.1: C18.1 47.802,15.109 48.002,15.309 48.761,15.309 50.661,17.209 51.905,17.209 52.655,16.459 57.495,16.459 57.655,16.299 C22.1 60.888,16.299 61.129,16.059 JWT.1
VEE_B: C23.2 C24.2 C26.2 C28.2 JBT.3 R7.2 T1.6 | length 49.6
  Top Layer w0.25: C28.2@29.052,5.297 C28.2
  Top Layer w1.1: R7.2@16.252,4.759 R7.2 17.975,5.209 18.059,5.293 C24.2 22.576,5.293 22.58,5.297 C26.2 C28.2@29.052,5.297 ; C28.2 34.991,5.299 35.001,5.309 JBT.3@36.352,5.309
  Top Layer w1.5: R7.2@16.252,4.759 10.48,4.759 9.601,5.638 9.601,14.986 13.868,19.253 T1.6
VEE_U_T: C8.2 C9.2 C11.2 JUT.3 R4.2 T1.13 | length 28.3
  Top Layer w0.25: T1.13 40.982,37.118 T1.13@41.578,37.118 ; C8.2@47.402,41.609 C8.2 ; 65.605,42.199 65.639,42.233 66.276,42.233 JUT.3
  Top Layer w1.1: C8.2 51.302,41.609 R4.2 53.052,42.109 53.152,42.209 C9.2 57.495,42.209 57.505,42.199 C11.2 65.605,42.199
  Top Layer w1.5: T1.13@41.578,37.118 43.102,37.309 C8.2@47.402,41.609
VEE_V_T: C13.2 C14.2 C16.2 JVT.3 R5.2 T1.10 | length 27.1
  Top Layer w1.1: C13.2 51.302,25.009 R5.2 53.052,25.459 53.152,25.559 C14.2 57.388,25.559 57.578,25.749 C16.2 65.512,25.749 65.522,25.759 JVT.3
  Top Layer w1.5: T1.10 43.536,26.873 45.4,25.009 C13.2
VEE_W_T: C18.2 C19.2 C21.2 JWT.3 R6.2 T1.7 | length 34.2
  Top Layer w0.25: T1.7@40.82,19.126 T1.7
  Top Layer w1.1: C18.2 50.727,8.509 51.202,8.984 53.077,8.984 53.152,9.059 C19.2 57.495,9.059 57.505,9.049 C21.2 62.956,9.049 62.966,9.059 JWT.3
  Top Layer w1.5: T1.7@40.82,19.126 44.25,15.696 44.25,9.395 45.136,8.509 C18.2
VIN: C1.1 C2.1 IC1.3 JT.1 R1.1 R3.1 | length 37.3
  Top Layer w0.25: C1.1 11.625,52.032 ; IC1.3 12.945,43.696 13.538,44.289 13.538,44.983
  Top Layer w0.5: C2.1 13.225,47.802 13.538,47.488 13.538,44.983
  Top Layer w1.1: R3.1 6.875,50.421 7.78,51.327 10.099,51.327 10.599,50.827 C1.1 11.625,49.427 C2.1@13.2,47.852 ; 11.625,52.032 13.441,53.848 25.375,53.848 27.375,51.848 JT.1

## Polygon pours and split planes (outlines as drawn)
GND on Top Layer "GND_L01_P008" (solid, pour order 8): 2.5,55 2.5,28 32,28 32,55
VEE_U_T on Top Layer "VEE_U_T_L01_P003" (solid, pour order 3): 43,52 43,40.5 71,40.5 71,52
VEE_B on Top Layer "VEE_B_L01_P007" (solid, pour order 7): 8.5,15 8.5,3 41,3 41,15
VEE_W_T on Top Layer "VEE_W_T_L01_P005" (solid, pour order 5): 43,18.5 43,7 71,7 71,18.5
VEE_V_T on Top Layer "VEE_V_T_L01_P004" (solid, pour order 4): 43,35 43,23.5 71,23.5 71,35
GND on Bottom Layer "GND_L02_P009" (solid, pour order 9): 2.5,55 2.5,28 32,28 32,55
VEE_B on Bottom Layer "VEE_B_L02_P013" (solid, pour order 13): 8.5,15 8.5,3 41,3 41,15
VEE_W_T on Bottom Layer "VEE_W_T_L02_P012" (solid, pour order 12): 43,18.5 43,7 71,7 71,18.5
VEE_V_T on Bottom Layer "VEE_V_T_L02_P011" (solid, pour order 11): 43,35 43,23.5 71,23.5 71,35
VEE_U_T on Bottom Layer "VEE_U_T_L02_P010" (solid, pour order 10): 43,52 43,40.5 71,40.5 71,52

## Keep-outs
Keep-Out Layer:
  lines w1: -0.51,0.009 ccw(c-0.01,0.009) -0.01,-0.491 ; -0.51,0.009 ccw(c-0.01,0.009) -0.01,-0.491 ; -0.51,0.009 -0.51,54.727 ; -0.51,54.727 cw(c-0.01,54.727) -0.363,55.081 ; -0.51,54.727 cw(c-0.01,54.727) -0.364,55.08 ; -0.363,55.081 3.918,59.362 ; -0.364,55.08 -0.363,55.081 ; -0.01,-0.491 68.97,-0.491 ; 3.918,59.362 cw(c4.272,59.009) 4.272,59.509 ; 3.918,59.362 cw(c4.272,59.009) 4.272,59.509 ; 3.918,59.362 3.918,59.362 ; 4.272,59.509 72.802,59.509 ; 68.97,-0.491 ccw(c68.97,0.009) 69.323,-0.345 69.324,-0.344 ; 68.97,-0.491 ccw(c68.97,0.009) 69.324,-0.344 ; 69.324,-0.344 73.155,3.487 ; 72.802,59.509 cw(c72.802,59.009) 73.302,59.009 ; 72.802,59.509 cw(c72.802,59.009) 73.302,59.009 ; 73.155,3.487 ccw(c72.802,3.841) 73.302,3.841 ; 73.155,3.487 73.155,3.487 ccw(c72.802,3.841) 73.302,3.841 ; 73.302,3.841 73.302,59.009

## Other copper
Top Layer:
  region: 157 vertices and 0 holes, not listed, extent 6.468,25.714 6.761,26.032
  region: 4.29,19.214 4.29,19.157 4.295,19.157 4.295,19.147 4.29,19.147 4.29,19.142 4.276,19.142 4.276,19.147 4.266,19.147 4.266,19.152 4.247,19.152 4.247,19.157 4.223,19.157 4.223,19.161 4.208,19.161 4.208,19.166 4.184,19.166 4.184,19.171 4.174,19.171 4.174,19.176 4.16,19.176 4.16,19.181 4.155,19.181 4.155,19.21 4.16,19.21 4.16,19.214 4.165,19.214 4.165,19.224 4.17,19.224 4.17,19.234 4.174,19.234 4.174,19.239 4.179,19.239 4.179,19.248 4.184,19.248 4.184,19.253 4.189,19.253 4.189,19.263 4.194,19.263 4.194,19.267 4.198,19.267 4.198,19.277 4.203,19.277 4.203,19.282 4.208,19.282 4.208,19.292 4.213,19.292 4.213,19.301 4.218,19.301 4.218,19.306 4.223,19.306 4.223,19.316 4.227,19.316 4.227,19.32 4.232,19.32 4.232,19.325 4.237,19.325 4.237,19.335 4.242,19.335 4.242,19.34 4.247,19.34 4.247,19.349 4.251,19.349 4.251,19.359 4.256,19.359 4.256,19.364 4.261,19.364 4.261,19.373 4.266,19.373 4.266,19.378 4.271,19.378 4.271,19.388 4.276,19.388 4.276,19.393 4.28,19.393 4.28,19.398 4.29,19.398 4.29,19.388 4.295,19.388 4.295,19.383 4.29,19.383 4.29,19.219
  region: 2.262,20.92 2.267,20.92 2.267,20.91 2.271,20.91 2.271,20.901 2.276,20.901 2.276,20.891 2.281,20.891 2.281,20.881 2.286,20.881 2.286,20.877 2.291,20.877 2.291,20.857 2.281,20.857 2.281,20.852 2.252,20.852 2.252,20.848 2.233,20.848 2.233,20.843 2.204,20.843 2.204,20.838 2.185,20.838 2.185,20.833 2.165,20.833 2.165,20.828 2.136,20.828 2.136,20.824 2.117,20.824 2.117,20.819 2.098,20.819 2.098,20.814 2.093,20.814 2.093,20.809 2.079,20.809 2.079,20.804 2.055,20.804 2.055,20.809 2.05,20.809 2.05,20.814 2.055,20.814 2.055,20.819 2.059,20.819 2.059,20.824 2.064,20.824 2.064,20.833 2.074,20.833 2.074,20.838 2.079,20.838 2.079,20.843 2.083,20.843 2.083,20.848 2.088,20.848 2.088,20.852 2.093,20.852 2.093,20.857 2.098,20.857 2.098,20.862 2.103,20.862 2.103,20.867 2.108,20.867 2.108,20.872 2.112,20.872 2.112,20.877 2.117,20.877 2.117,20.881 2.122,20.881 2.122,20.886 2.127,20.886 2.127,20.891 2.132,20.891 2.132,20.896 2.136,20.896 2.136,20.901 2.141,20.901 2.141,20.91 2.146,20.91 2.146,20.915 2.151,20.915 2.151,20.925 2.156,20.925 2.156,20.93 2.161,20.93 2.161,20.934 2.165,20.934 2.165,20.944 2.17,20.944 2.17,20.949 2.175,20.949 2.175,20.954 2.18,20.954 2.18,20.958 2.185,20.958 2.185,20.963 2.189,20.963 2.189,20.968 2.194,20.968 2.194,20.973 2.199,20.973 2.199,20.978 2.204,20.978 2.204,20.983 2.209,20.983 2.209,20.987 2.214,20.987 2.214,20.992 2.223,20.992 2.223,20.987 2.228,20.987 2.228,20.978 2.233,20.978 2.233,20.968 2.238,20.968 2.238,20.958 2.242,20.958 2.242,20.954 2.247,20.954 2.247,20.944 2.252,20.944 2.252,20.934 2.257,20.934 2.257,20.925 2.262,20.925
  region: 166 vertices and 0 holes, not listed, extent 8.351,21.233 8.669,21.537
  region: 1.828,23.647 1.939,23.647 1.939,23.642 1.944,23.642 1.944,23.627 1.939,23.627 1.939,23.618 1.934,23.618 1.934,23.599 1.929,23.599 1.929,23.584 1.924,23.584 1.924,23.565 1.92,23.565 1.92,23.546 1.915,23.546 1.915,23.531 1.91,23.531 1.91,23.502 1.905,23.502 1.905,23.497 1.896,23.497 1.896,23.502 1.886,23.502 1.886,23.507 1.881,23.507 1.881,23.512 1.871,23.512 1.871,23.517 1.867,23.517 1.867,23.521 1.862,23.521 1.862,23.526 1.852,23.526 1.852,23.531 1.847,23.531 1.847,23.536 1.838,23.536 1.838,23.541 1.833,23.541 1.833,23.546 1.823,23.546 1.823,23.55 1.818,23.55 1.818,23.555 1.809,23.555 1.809,23.56 1.804,23.56 1.804,23.565 1.799,23.565 1.799,23.57 1.79,23.57 1.79,23.574 1.785,23.574 1.785,23.579 1.775,23.579 1.775,23.584 1.77,23.584 1.77,23.589 1.761,23.589 1.761,23.594 1.751,23.594 1.751,23.599 1.746,23.599 1.746,23.603 1.741,23.603 1.741,23.608 1.732,23.608 1.732,23.613 1.727,23.613 1.727,23.618 1.717,23.618 1.717,23.623 1.712,23.623 1.712,23.627 1.703,23.627 1.703,23.632 1.698,23.632 1.698,23.637 1.688,23.637 1.688,23.642 1.684,23.642 1.684,23.647 1.693,23.647 1.693,23.652 1.703,23.652 1.703,23.647 1.823,23.647
  region: 1.737,22.086 1.712,22.086 1.712,22.091 1.688,22.091 1.688,22.095 1.684,22.095 1.684,22.1 1.674,22.1 1.674,22.105 1.664,22.105 1.664,22.11 1.66,22.11 1.66,22.115 1.65,22.115 1.65,22.12 1.645,22.12 1.645,22.124 1.64,22.124 1.64,22.129 1.635,22.129 1.635,22.134 1.631,22.134 1.631,22.139 1.626,22.139 1.626,22.148 1.621,22.148 1.621,22.153 1.616,22.153 1.616,22.163 1.611,22.163 1.611,22.173 1.607,22.173 1.607,22.182 1.602,22.182 1.602,22.197 1.597,22.197 1.597,22.259 1.602,22.259 1.602,22.274 1.607,22.274 1.607,22.283 1.611,22.283 1.611,22.298 1.616,22.298 1.616,22.303 1.621,22.303 1.621,22.312 1.626,22.312 1.626,22.317 1.631,22.317 1.631,22.322 1.635,22.322 1.635,22.327 1.64,22.327 1.64,22.332 1.645,22.332 1.645,22.336 1.65,22.336 1.65,22.341 1.66,22.341 1.66,22.346 1.664,22.346 1.664,22.351 1.674,22.351 1.674,22.356 1.688,22.356 1.688,22.36 1.698,22.36 1.698,22.365 1.722,22.365 1.722,22.37 1.79,22.37 1.79,22.365 1.814,22.365 1.814,22.36 1.818,22.36 1.818,22.356 1.833,22.356 1.833,22.351 1.838,22.351 1.838,22.346 1.847,22.346 1.847,22.341 1.852,22.341 1.852,22.336 1.857,22.336 1.857,22.332 1.867,22.332 1.867,22.322 1.876,22.322 1.876,22.312 1.881,22.312 1.881,22.307 1.886,22.307 1.886,22.298 1.891,22.298 1.891,22.293 1.896,22.293 1.896,22.283 1.9,22.283 1.9,22.269 1.905,22.269 1.905,22.254 1.91,22.254 1.91,22.201 1.905,22.201 1.905,22.192 1.9,22.192 1.9,22.177 1.896,22.177 1.896,22.168 1.891,22.168 1.891,22.163 1.886,22.163 1.886,22.153 1.881,22.153 1.881,22.148 1.876,22.148 1.876,22.144 1.871,22.144 1.871,22.139 1.867,22.139 1.867,22.134 1.862,22.134 1.862,22.129 1.857,22.129 1.857,22.124 1.852,22.124 1.852,22.12 1.847,22.12 1.847,22.115 1.838,22.115 1.838,22.11 1.833,22.11 1.833,22.105 1.823,22.105 1.823,22.1 1.814,22.1 1.814,22.095 1.804,22.095 1.804,22.091 1.785,22.091 1.785,22.086 1.761,22.086 1.761,22.081 1.737,22.081
  region: 8.876,22.592 8.881,22.592 8.881,22.577 8.886,22.577 8.886,22.563 8.891,22.563 8.891,22.548 8.896,22.548 8.896,22.486 8.891,22.486 8.891,22.466 8.886,22.466 8.886,22.452 8.881,22.452 8.881,22.442 8.876,22.442 8.876,22.437 8.872,22.437 8.872,22.428 8.867,22.428 8.867,22.423 8.862,22.423 8.862,22.418 8.857,22.418 8.857,22.413 8.848,22.413 8.848,22.409 8.843,22.409 8.843,22.404 8.838,22.404 8.838,22.399 8.828,22.399 8.828,22.394 8.819,22.394 8.819,22.389 8.809,22.389 8.809,22.385 8.799,22.385 8.799,22.38 8.775,22.38 8.775,22.375 8.756,22.375 8.756,22.37 8.713,22.37 8.713,22.375 8.698,22.375 8.698,22.38 8.679,22.38 8.679,22.385 8.674,22.385 8.674,22.389 8.66,22.389 8.66,22.394 8.655,22.394 8.655,22.399 8.645,22.399 8.645,22.404 8.64,22.404 8.64,22.409 8.631,22.409 8.631,22.413 8.621,22.413 8.621,22.418 8.616,22.418 8.616,22.428 8.611,22.428 8.611,22.442 8.607,22.442 8.607,22.457 8.602,22.457 8.602,22.462 8.597,22.462 8.597,22.471 8.592,22.471 8.592,22.486 8.587,22.486 8.587,22.515 8.583,22.515 8.583,22.524 8.587,22.524 8.587,22.548 8.592,22.548 8.592,22.563 8.597,22.563 8.597,22.577 8.602,22.577 8.602,22.582 8.607,22.582 8.607,22.596 8.611,22.596 8.611,22.601 8.616,22.601 8.616,22.606 8.621,22.606 8.621,22.611 8.626,22.611 8.626,22.616 8.631,22.616 8.631,22.621 8.636,22.621 8.636,22.625 8.64,22.625 8.64,22.63 8.645,22.63 8.645,22.635 8.655,22.635 8.655,22.64 8.66,22.64 8.66,22.645 8.674,22.645 8.674,22.649 8.679,22.649 8.679,22.654 8.703,22.654 8.703,22.659 8.77,22.659 8.77,22.654 8.795,22.654 8.795,22.649 8.799,22.649 8.799,22.645 8.819,22.645 8.819,22.64 8.823,22.64 8.823,22.635 8.833,22.635 8.833,22.63 8.843,22.63 8.843,22.625 8.848,22.625 8.848,22.621 8.857,22.621 8.857,22.616 8.862,22.616 8.862,22.611 8.867,22.611 8.867,22.606 8.872,22.606 8.872,22.596 8.876,22.596

## Silkscreen, mask and mechanical layers (free items; w line width, h text height)
Top Overlay:
  drawing of 19 lines, arcs and shapes, not listed
  text "VIN" at 28.878,49.935 h0.8
  text "15" at 68.274,49.249 h0.8
  text "GND" at 28.827,46.303 h0.8
  text "0" at 68.782,45.693 h0.8
  text "-8" at 68.223,42.137 h0.8
  text "15" at 68.375,32.409 h0.8
  text "0" at 68.909,28.827 h0.8
  text "-8" at 68.274,25.348 h0.8
  text "15" at 68.426,15.696 h0.8
  text "Vande" at 0.754,15.07 h2.3 r270
  text "0" at 69.01,12.317 h0.8
  text "15" at 38.225,11.962 h0.8
  text "-8" at 68.299,8.634 h0.8
  text "0" at 38.86,8.482 h0.8
  text "-8" at 38.098,4.875 h0.8
  text "Isolated IGBT Gate" at 42.004,3.254 h1.5
  text "Drive Fly-Buck Power" at 39.504,0.754 h1.5

## Text inside footprints (layer, text, board x,y; h text height)
T1: Top 3D Body "14" at 43.856,38.849 h1.27; Top 3D Body "7" at 43.856,18.605 h1.27; Top 3D Body "6" at 17.44,18.605 h1.27; Top 3D Body "1" at 17.44,38.849 h1.27